# EAGLE board MECHWARFARE_BOARD (EAGLE 9.6.2)
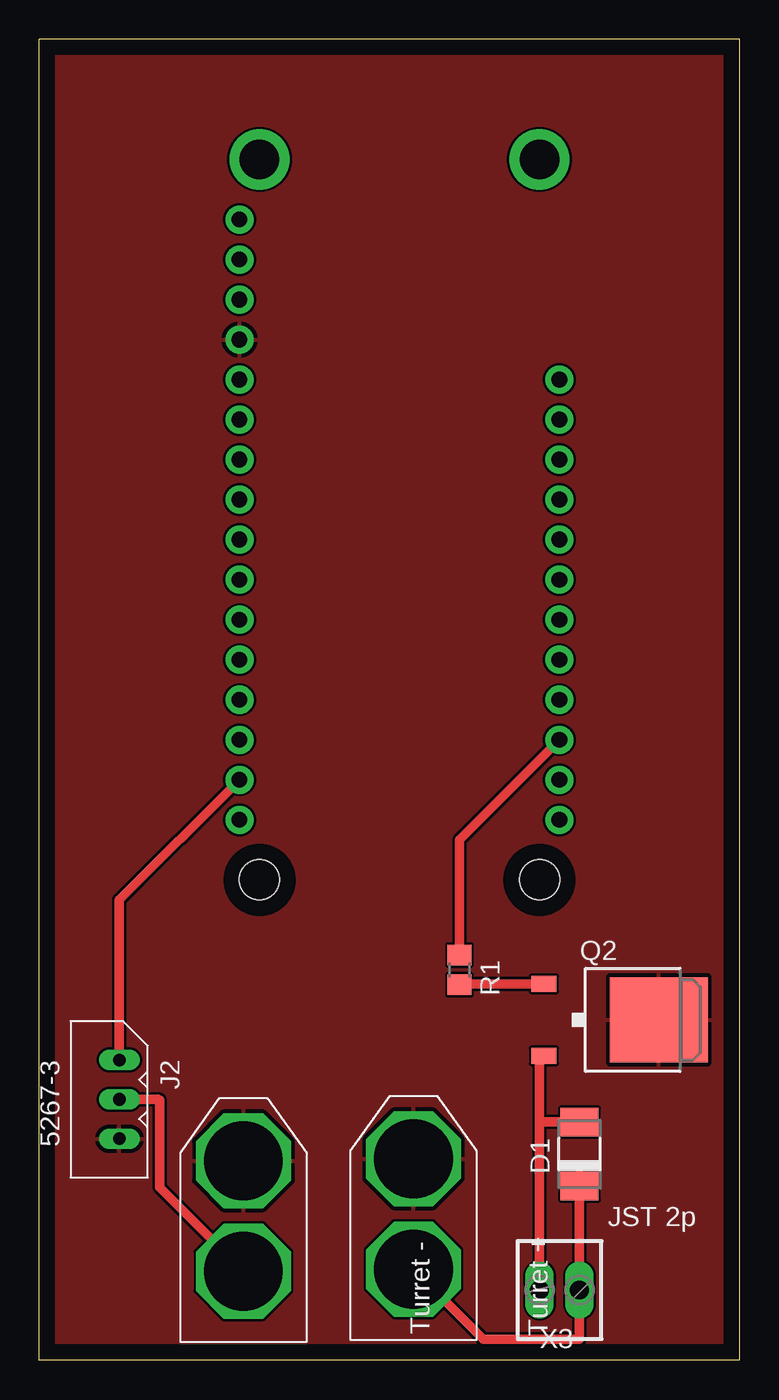
[diagram p0: board, top side]

Size 44.45 x 83.82 mm. Coordinates in mm from the lower left corner, seen from the top.
Copper layers (1*16): Top 0.035mm / dielectric 1.5mm / Bottom 0.035mm
Design rules "default": minimum track width 6mil, minimum drill 0.35mm, track to track 6mil, track to pad 6mil, pad to pad 6mil, via to via 6mil, smd to smd 6mil, copper to edge 40mil, drill to drill 6mil, minimum pad ring 10mil, minimum via ring 8mil, stop-mask expansion 4mil, vias tented up to drill 0mil, thermal gap 10mil

## Footprints (pad centres in the part's own frame; a part is rotated, then mirrored left to right if it is on the bottom)
DO-214AC = smd 1.8 x 2.4: A 2.025,0; C -2.025,0
5267-3 = drill 0.8 long: P$1 0,0; P$2 2.5,0; P$3 5,0
FEATHERWING = drill 1 pad 1.778: 1 6.35,1.27; 2 8.89,1.27; 3 11.43,1.27; 4 13.97,1.27; 5 16.51,1.27; 6 19.05,1.27; 7 21.59,1.27; 8 24.13,1.27; 9 26.67,1.27; 10 29.21,1.27; 11 31.75,1.27; 12 34.29,1.27; 13 36.83,1.27; 14 39.37,1.27; 15 41.91,1.27; 16 44.45,1.27; 17 44.45,21.59; 18 41.91,21.59; 19 39.37,21.59; 20 36.83,21.59; 21 34.29,21.59; 22 31.75,21.59; 23 29.21,21.59; 24 26.67,21.59; 25 24.13,21.59; 26 21.59,21.59; 27 19.05,21.59; 28 16.51,21.59 | drill 2.5 pad 3.81: P$1 2.54,20.32; P$2 2.54,2.54 | hole 2.54: 48.26,20.32; 48.26,2.54
TO252 = smd 1 x 1.6: 1 -2.28,-4.8; 2 2.28,-4.8 | smd 5.4 x 6.2: 3 0,2.5
R0805 = smd 1.3 x 1.5: 1 -0.95,0; 2 0.95,0
XT60 = drill 5 octagon: + 4.5,0; - 11.5,0
2POL254 = drill 1.2 long: 1 -1.27,0; 2 1.27,0

## Placement (x,y rotation side)
D1  [DO-214AC]  34.29,13.08 90 top
J2  5267-3  [5267-3]  5.08,19.05 270 top
MS2  FEATHERWINGEXTENDED_BOTH_ENDS  [FEATHERWING]  11.43,78.74 270 top
Q2  FDD4141TO252  [TO252]  36.83,21.59 270 top
R1  100  [R0805]  26.67,24.77 270 top
U$1  XT60  [XT60]  12.95,1.14 90 top
U$2  XT60  [XT60]  23.75,1.27 90 top
X3  [2POL254]  33.02,4.45 180 top

## Library data of the parts
D1 = diode
J2 = con-molex-spox
MS2 X3 = ME507
Q2 = transistor-fet
R1 = rcl; SPICEPREFIX: R
U$1 U$2 = XT60

## Nets
GATE: Q2.1 R1.2
GND: J2.P$3 MS2.4 Q2.3 U$1.- U$2.-
MOTOR_CMD: J2.P$1 MS2.15
MOTOR_POWER: J2.P$2 U$1.+
TURRET_IO: MS2.19 R1.1
TURRET_NEG: D1.A Q2.2 X3.2
TURRET_POS: D1.C U$2.+ X3.1

## Tracks (layer width: path | path; a pad name or v marks a point on that pad's centre or on a via)
GATE
  Top 0.61: R1.2 26.73,23.87 Q2.1
GND
  pour Top: 0,83.82 0,0 44.45,0 44.45,83.82
MOTOR_CMD
  Top 0.61: J2.P$1 5.08,29.21 MS2.15
MOTOR_POWER
  Top 0.508: J2.P$2 6.35,16.55
  Top 0.61: J2.P$2 7.58,16.55 7.62,16.51 7.62,10.98 U$1.+
TURRET_IO
  Top 0.61: R1.1 26.67,33.02 MS2.19
TURRET_NEG
  Top 0.61: 32.27,19.07 Q2.2 31.75,19.03 X3.2 31.75,15.11 D1.A
TURRET_POS
  Top 0.61: 34.29,11.77 D1.C X3.1 34.29,1.32 28.2,1.32 U$2.+

## Text on the board
tNames: JST 2p | Turret - | Turret +
bNames: KL AT CS | Mech Warfare 2022